# Altium PCB AnalogIO-CAN-HW-Rev1.PcbDoc (part 1 of 2)
Units mil, origin at the board's own origin, x right, y up, seen from the top; angles counter-clockwise.
Board outline 6000 x 4000 mil, 4 copper layers (Top Layer, Power Layer, Ground Layer, Bottom Layer), stack 22.156 mil thick; 185 components, 126 nets, 530 pads, 4 vias.
Unrouted connection lines stored in the file: 357.
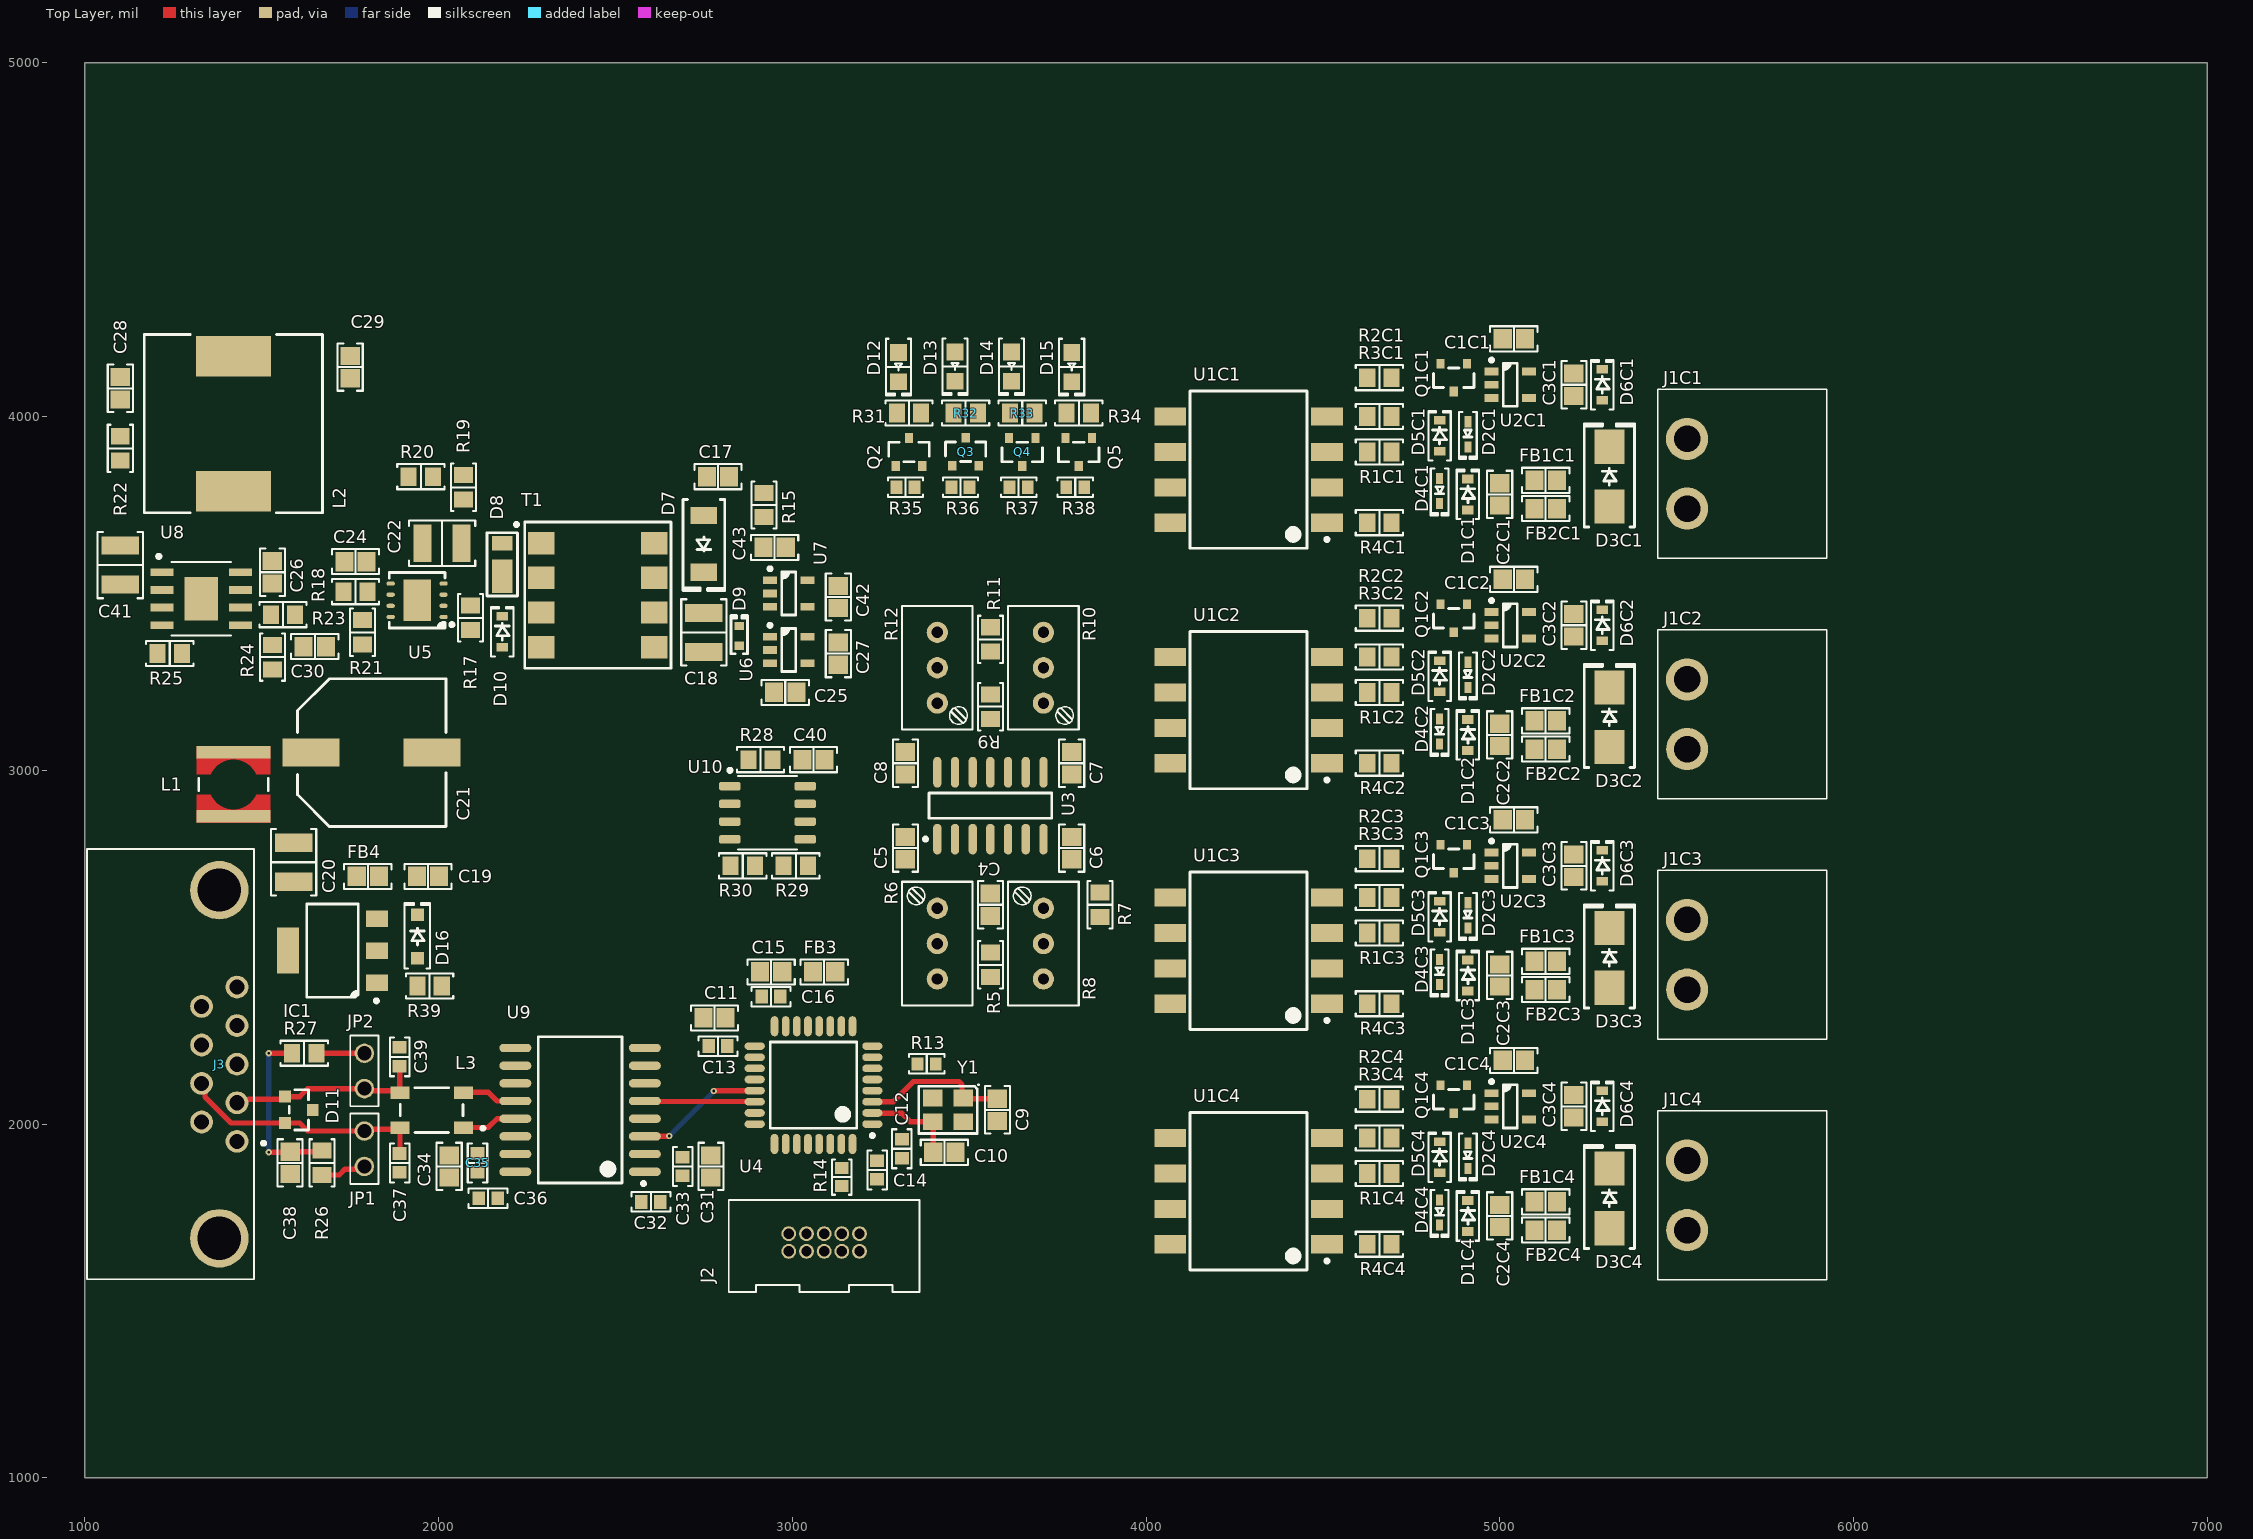
[diagram p0: Top Layer view]
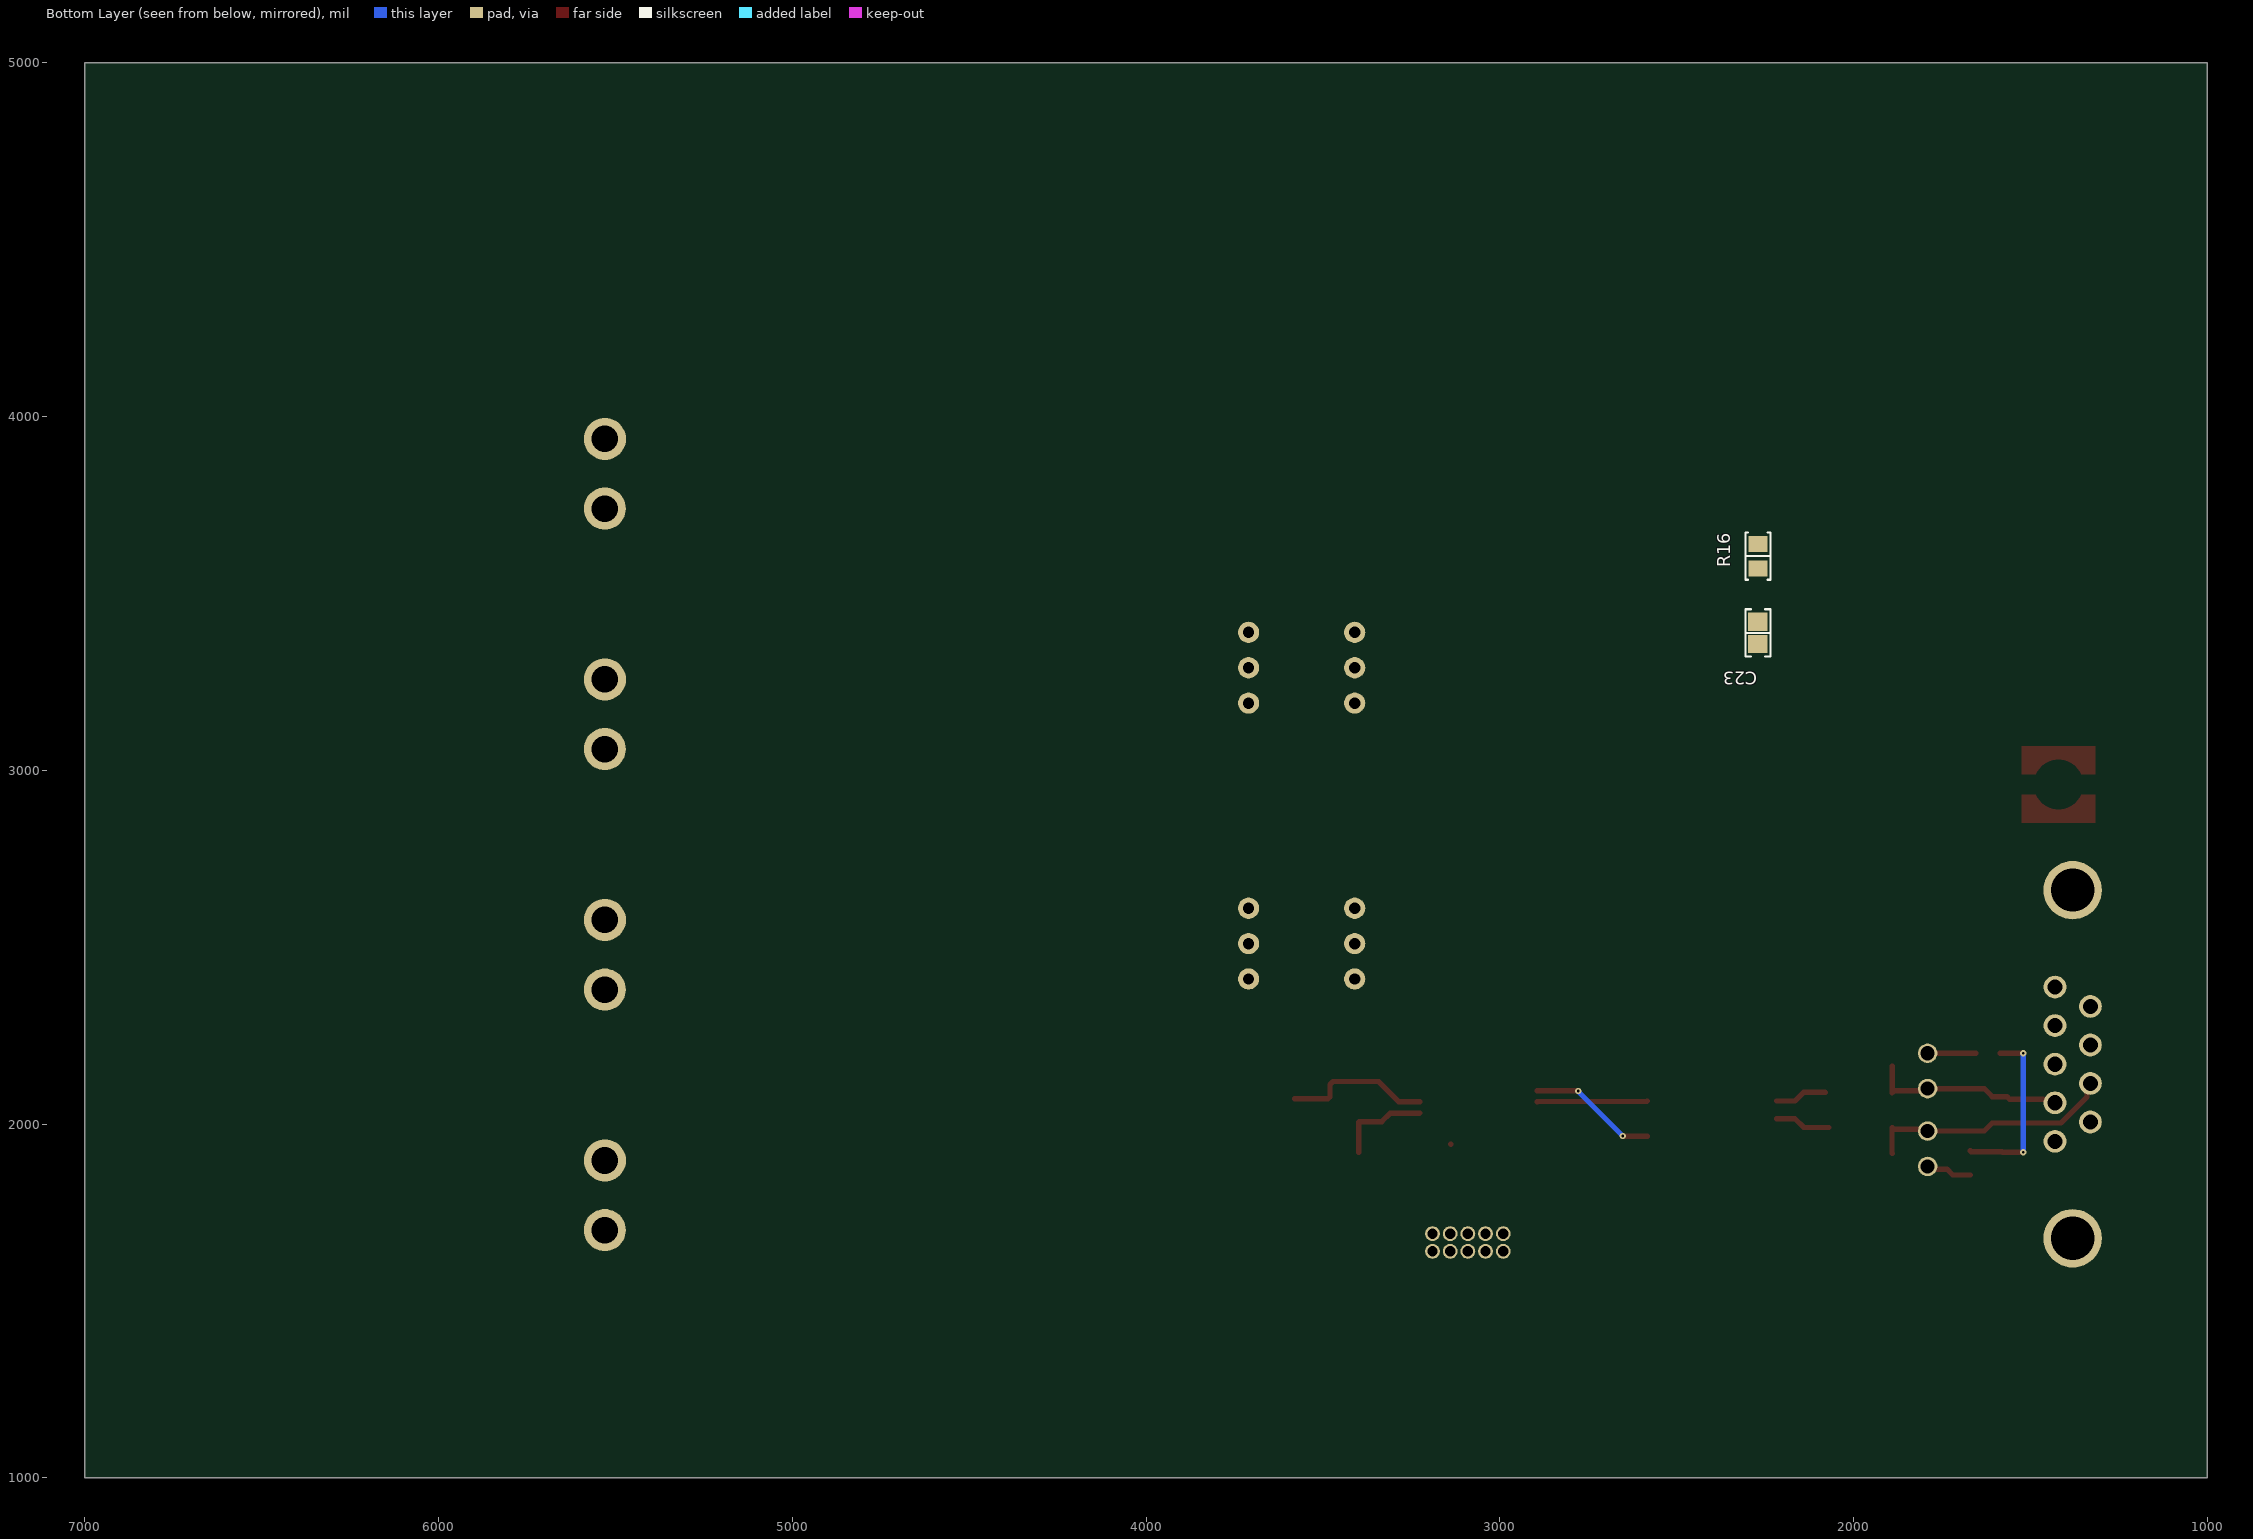
[diagram p1: Bottom Layer view, seen from below]

## Layer stack, top to bottom
Top Solder: solder mask 0.4, Solder Resist, Dk 3.5
Top Layer: signal copper 1.4
Dielectric 2: prepreg 2, PP-001, Dk 3.9
Power Layer: signal copper 1.378
Dielectric 1: dielectric 12.6, FR-4, Dk 4.8
Ground Layer: signal copper 1.378
Dielectric 3: prepreg 2, PP-001, Dk 3.9
Bottom Layer: signal copper 1.4
Bottom Solder: solder mask 0.4, Solder Resist, Dk 3.5

## Board outline
1000,1000 7000,1000 7000,5000 1000,5000

## Design rules (kind name [scope] priority, off if disabled: settings)
BoardOutlineClearance [All] p1: gap=7.87 ignorepadtopadclearanceinfootprint=FALSE
Clearance [All] p1: gap=4 ignorepadtopadclearanceinfootprint=FALSE except(5: Arc-Via Track-Via SMDPad-Via THPad-Via Via-Via Via-Fill Via-Poly Via-Region Via-Text; 9.84: Arc-Hole Track-Hole SMDPad-Hole THPad-Hole Via-Hole Fill-Hole Poly-Hole Region-Hole Text-Hole)
ComponentClearance [All] p1: gap=4 collisioncheckmode=3 verticalgap=4 showdistances=TRUE
DiffPairsRouting [All] p1: maxlimit=4 minlimit=4 mostfreqgap=4 toplayer_minwidth=4 toplayer_maxwidth=71497.94 toplayer_prefwidth=4 midlayer1_minwidth=4 midlayer1_maxwidth=71497.94 midlayer1_prefwidth=4 midlayer2_minwidth=4 midlayer2_maxwidth=71497.94 midlayer2_prefwidth=4 bottomlayer_minwidth=4 bottomlayer_maxwidth=71497.94 bottomlayer_prefwidth=4 maxuncoupledlength=500
Height [All] p1: minheight=0 maxheight=71497.94 prefheight=500
HoleSize [All] p1: absolutevalues=TRUE maxlimit=248.03 minlimit=7.87 maxpercent=80.000 minpercent=20.000
HoleToHoleClearance [All] p1: gap=9.84 allowstackedmicrovias=FALSE
MinimumAnnularRing [All] p1: minimumring=3
MinimumSolderMaskSliver [All] p1: minsoldermaskwidth=0
PlaneClearance [All] p1: clearance=4
PlaneConnect PlaneConnectPowerPads [InPadClass('PowerPads')] p1: planeconnectstyle=Direct reliefexpansion=20 reliefentries=4 reliefconductorwidth=10 reliefairgap=10
PlaneConnect [All] p2: pad.planeconnectstyle=Relief pad.reliefexpansion=11.81 pad.reliefentries=4 pad.reliefconductorwidth=4 pad.reliefairgap=4 via.planeconnectstyle=Direct via.reliefexpansion=11.81 via.reliefentries=4 via.reliefconductorwidth=5 via.reliefairgap=5
PolygonConnect PolygonConnectPowerPads [All vs (InPadClass('PowerPads'))] p1: connectstyle=Direct reliefconductorwidth=10 reliefentries=4 polygonreliefangle="90 Angle" airgapwidth=10
PolygonConnect [All] p2: thpad.connectstyle=Relief thpad.reliefconductorwidth=4 thpad.reliefentries=4 thpad.polygonreliefangle="90 Angle" thpad.airgapwidth=4 smdpad.connectstyle=Relief smdpad.reliefconductorwidth=4 smdpad.reliefentries=4 smdpad.polygonreliefangle="90 Angle" smdpad.airgapwidth=4 via.connectstyle=Direct via.reliefconductorwidth=5 via.reliefentries=4 via.polygonreliefangle="90 Angle" via.airgapwidth=5
RoomDefinition U_PowerModule [InComponentClass('U_PowerModule')] p1: confinementstyle=ConfineIn formatcopy=TRUE lockcomponents=FALSE outline 0,0 2000,0 2000,1000 0,1000
RoomDefinition U_Peripherals [InComponentClass('U_Peripherals')] p2: confinementstyle=ConfineIn formatcopy=TRUE lockcomponents=FALSE outline 0,0 2000,0 2000,1000 0,1000
RoomDefinition U_CPU [InComponentClass('U_CPU')] p3: confinementstyle=ConfineIn formatcopy=TRUE lockcomponents=FALSE outline 0,0 2000,0 2000,1000 0,1000
RoomDefinition U_CanTransceiver [InComponentClass('U_CanTransceiver')] p4: confinementstyle=ConfineIn formatcopy=TRUE lockcomponents=FALSE outline 0,0 2000,0 2000,1000 0,1000
RoomDefinition U_AnalogueIsolatedReceiver [InComponentClass('U_AnalogueIsolatedReceiver')] p5: confinementstyle=ConfineIn formatcopy=TRUE lockcomponents=FALSE outline 3840,0 5840,0 5840,1000 3840,1000
RoomDefinition ARM4 [InComponentClass('ARM4')] p6: confinementstyle=ConfineIn formatcopy=TRUE lockcomponents=FALSE outline 4010,1550 5940,1550 5940,2230 4010,2230
RoomDefinition ARM3 [InComponentClass('ARM3')] p7: confinementstyle=ConfineIn formatcopy=TRUE lockcomponents=FALSE outline 4010,2230 5940,2230 5940,2910 4010,2910
RoomDefinition ARM2 [InComponentClass('ARM2')] p8: confinementstyle=ConfineIn formatcopy=TRUE lockcomponents=FALSE outline 4010,2910 5940,2910 5940,3590 4010,3590
RoomDefinition ARM1 [InComponentClass('ARM1')] p9: confinementstyle=ConfineIn formatcopy=TRUE lockcomponents=FALSE outline 4010,3590 5940,3590 5940,4270 4010,4270
RoutingVias [All] p1: holewidth=7.87 width=17.72 viastyle="Through Hole" minholewidth=7.87 minwidth=17.72 maxholewidth=248.03 maxwidth=257.87
SilkToSilkClearance [All] p1: silktosilkclearance=0
SilkToSolderMaskClearance [IsPad] p1: minsilkscreentomaskgap=4 clearancetoexposedcopper=TRUE
SolderMaskExpansion [All] p1: expansion=2.95 istentingtop=FALSE
Width [All] p1: maxlimit=71497.94 minlimit=4 preferedwidth=4
20 further rules are at their usual default settings.

## Classes and differential pairs
channel class AnalogReceiverModule: ARM1 ARM2 ARM3 ARM4
net class LEDIND[1..4]: LEDIND1 LEDIND2 LEDIND3 LEDIND4
net class ISOIN[1..4]: ISOIN1 ISOIN2 ISOIN3 ISOIN4
net class AICHN[1..4]: AICHN1 AICHN2 AICHN3 AICHN4
component class U_PowerModule: C17 C18 C19 C20 C21 C22 C23 C24 C25 C26 C27 C28 C29 C30 C41 C42 C43 D7 D8 D9 D10 D16 FB4 IC1 L1 L2 R15 R16 R17 R18 R19 R20 R21 R22 R23 R24 R25 R39 T1 U5 U6 U7 U8
component class U_Peripherals: " " "    " C40 D12 D13 D14 D15 Q2 Q3 Q4 Q5 R28 R29 R30 R31 R32 R33 R34 R35 R36 R37 R38 U10
component class U_CPU: C9 C10 C11 C12 C13 C14 C15 C16 FB3 J2 R13 R14 U4 Y1
component class U_CanTransceiver: C31 C32 C33 C34 C35 C36 C37 C38 C39 D11 J3 JP1 JP2 L3 R26 R27 U9
component class U_AnalogueIsolatedReceiver: C4 C5 C6 C7 C8 R5 R6 R7 R8 R9 R10 R11 R12 U3
component class ARM4: C1C4 C2C4 C3C4 D1C4 D2C4 D3C4 D4C4 D5C4 D6C4 FB1C4 FB2C4 J1C4 Q1C4 R1C4 R2C4 R3C4 R4C4 U1C4 U2C4
component class ARM3: C1C3 C2C3 C3C3 D1C3 D2C3 D3C3 D4C3 D5C3 D6C3 FB1C3 FB2C3 J1C3 Q1C3 R1C3 R2C3 R3C3 R4C3 U1C3 U2C3
component class ARM2: C1C2 C2C2 C3C2 D1C2 D2C2 D3C2 D4C2 D5C2 D6C2 FB1C2 FB2C2 J1C2 Q1C2 R1C2 R2C2 R3C2 R4C2 U1C2 U2C2
component class ARM1: C1C1 C2C1 C3C1 D1C1 D2C1 D3C1 D4C1 D5C1 D6C1 FB1C1 FB2C1 J1C1 Q1C1 R1C1 R2C1 R3C1 R4C1 U1C1 U2C1

## Components (designator, comment, footprint, x,y, rotation, side; value= is the part's Value field where it differs from the comment)
C1C1 "1 nF" "CAP 0805_2012" 5040,4220 r0 top (schematic designator C1)
C1C2 "1 nF" "CAP 0805_2012" 5040,3540 r0 top (schematic designator C1)
C1C3 "1 nF" "CAP 0805_2012" 5040,2860 r0 top (schematic designator C1)
C1C4 "1 nF" "CAP 0805_2012" 5040,2180 r0 top (schematic designator C1)
C2C1 "10 nF" "CAP 0805_2012" 5000,3780 r270 top (schematic designator C2)
C2C2 "10 nF" "CAP 0805_2012" 5000,3100 r270 top (schematic designator C2)
C2C3 "10 nF" "CAP 0805_2012" 5000,2420 r270 top (schematic designator C2)
C2C4 "10 nF" "CAP 0805_2012" 5000,1740 r270 top (schematic designator C2)
C3C1 "100 nF" "CAP 0805_2012" 5210,4090 r90 top (schematic designator C3)
C3C2 "100 nF" "CAP 0805_2012" 5210,3410 r90 top (schematic designator C3)
C3C3 "100 nF" "CAP 0805_2012" 5210,2730 r90 top (schematic designator C3)
C3C4 "100 nF" "CAP 0805_2012" 5210,2050 r90 top (schematic designator C3)
C4 "100 nF" "CAP 0805_2012" 3560,2620 r90 top
C5 "1 nF" "CAP 0805_2012" 3320,2780 r270 top
C6 "1 nF" "CAP 0805_2012" 3790,2780 r270 top
C7 "1 nF" "CAP 0805_2012" 3790,3020 r90 top
C8 "1 nF" "CAP 0805_2012" 3320,3020 r90 top
C9 "5.1 pF" "CAP 0805_2012" 3580,2040 r270 top
C10 "5.1 pF" "CAP 0805_2012" 3430,1920 r180 top
C11 "4.7 uF" "CAP 0805_2012" 2780,2300 r0 top
C12 "100 nF" "CAP 0603_1608" 3310,1930 r270 top
C13 "100 nF" "CAP 0603_1608" 2790,2220 r180 top
C14 "100 nF" "CAP 0603_1608" 3240,1870 r270 top
C15 "1 uF" "CAP 0805_2012" 2940,2430 r0 top
C16 "100 nF" "CAP 0603_1608" 2940,2360 r180 top
C17 "22 pF" "CAP 0805_2012" 2790,3830 r0 top
C18 "100 uF" "CAP 1210_3225 - 2.5MM" 2750,3390 r270 top
C19 "0.1 uF" "CAP 0805_2012" 1970,2700 r0 top
C20 "4.7 uF" "CAP 1210_3225 - 2.0MM" 1590,2740 r270 top
C21 "33 uF" "CAP ALSMD POLY 10.3MM H10.2MM" 1810,3050 r0 top
C22 "4.7 uF" "CAP 1210_3225 - 2.0MM" 2010,3642 r0 top
C23 "22 pF" "CAP 0805_2012" 2270,3388.5 r270 bottom
C24 "47 nF" "CAP 0805_2012" 1765,3590 r0 top
C25 "1 uF" "CAP 0805_2012" 2980,3220 r0 top
C26 "2.2 nF" "CAP 0805_2012" 1530,3560 r270 top
C27 "1 uF" "CAP 0805_2012" 3130,3330 r270 top
C28 "1.2 nF" "CAP 0805_2012" 1100,4080 r270 top
C29 "2.2 uF" "CAP 0805_2012" 1750,4140 r90 top
C30 "56 pF" "CAP 0805_2012" 1650,3350 r0 top
C31 "10 uF" "CAP 0805_2012" 2770,1880 r90 top
C32 "1 uF" "CAP 0603_1608" 2600,1780 r0 top
C33 "100 nF" "CAP 0603_1608" 2690,1880 r90 top
C34 "10 uF" "CAP 0805_2012" 2030,1880 r90 top
C35 "1 uF" "CAP 0603_1608" 2110,1890 r270 top
C36 "100 nF" "CAP 0603_1608" 2140,1790 r180 top
C37 "68 pF" "CAP 0603_1608" 1890,1890 r270 top
C38 "47 nF" "CAP 0805_2012" 1580,1890 r90 top
C39 "68 pF" "CAP 0603_1608" 1890,2190 r270 top
C40 "10 nF" "CAP 0805_2012" 3060,3030 r180 top
C41 "2.2 uF" "CAP 1210_3225 - 2.5MM" 1100,3580 r270 top
C42 "1 uF" "CAP 0805_2012" 3130,3490 r270 top
C43 "1 uF" "CAP 0805_2012" 2950,3630 r0 top
D1C1 "BAT46JFILM" SOD323 4910,3780 r90 top (schematic designator D1)
D1C2 "BAT46JFILM" SOD323 4910,3100 r90 top (schematic designator D1)
D1C3 "BAT46JFILM" SOD323 4910,2420 r90 top (schematic designator D1)
D1C4 "BAT46JFILM" SOD323 4910,1740 r90 top (schematic designator D1)
D2C1 "CDSU101A-HF" SOD523F 4910,3950 r270 top (schematic designator D2)
D2C2 "CDSU101A-HF" SOD523F 4910,3270 r270 top (schematic designator D2)
D2C3 "CDSU101A-HF" SOD523F 4910,2590 r270 top (schematic designator D2)
D2C4 "CDSU101A-HF" SOD523F 4910,1910 r270 top (schematic designator D2)
D3C1 "SM6T39CAY" "DO214AA SMB" 5310,3830 r90 top (schematic designator D3)
D3C2 "SM6T39CAY" "DO214AA SMB" 5310,3150 r90 top (schematic designator D3)
D3C3 "SM6T39CAY" "DO214AA SMB" 5310,2470 r90 top (schematic designator D3)
D3C4 "SM6T39CAY" "DO214AA SMB" 5310,1790 r90 top (schematic designator D3)
D4C1 "CDSU101A-HF" SOD523F 4830,3790 r270 top (schematic designator D4)
D4C2 "CDSU101A-HF" SOD523F 4830,3110 r270 top (schematic designator D4)
D4C3 "CDSU101A-HF" SOD523F 4830,2430 r270 top (schematic designator D4)
D4C4 "CDSU101A-HF" SOD523F 4830,1750 r270 top (schematic designator D4)
D5C1 "BAT46JFILM" SOD323 4830,3946.2 r90 top (schematic designator D5)
D5C2 "BAT46JFILM" SOD323 4830,3266.2 r90 top (schematic designator D5)
D5C3 "BAT46JFILM" SOD323 4830,2586.2 r90 top (schematic designator D5)
D5C4 "BAT46JFILM" SOD323 4830,1906.2 r90 top (schematic designator D5)
D6C1 "BZX384C3V3-E3-08" SOD323 5290,4090 r90 top (schematic designator D6)
D6C2 "BZX384C3V3-E3-08" SOD323 5290,3410 r90 top (schematic designator D6)
D6C3 "BZX384C3V3-E3-08" SOD323 5290,2730 r90 top (schematic designator D6)
D6C4 "BZX384C3V3-E3-08" SOD323 5290,2050 r90 top (schematic designator D6)
D7 "FSV340AF" "ON DO214AD SMAF" 2750,3640 r270 top
D8 "DFLZ24-7" POWERDI123 2180,3589 r90 top
D9 "BZT52C4V7T" SOD-523 2850,3380 r90 top
D10 "CMDD4448" SOD323 2180,3392 r90 top
D11 "CDSOT23-SM712" "BOURNS SOT-23-3" 1605,2040 r0 top
D12 "VFHD1112H-3B72B-TR" "LED 0805_2012 GREEN" 3300,4140 r270 top
D13 "VFHD1112H-3B72B-TR" "LED 0805_2012 GREEN" 3460,4141.34 r270 top
D14 "VFHD1112H-3B72B-TR" "LED 0805_2012 GREEN" 3620,4141.34 r270 top
D15 "VFHD1112H-3B72B-TR" "LED 0805_2012 GREEN" 3790,4140 r270 top
D16 "MMSZ5240BS-7-F" SOD-123 1940,2530 r90 top
FB1C1 "600 Ohms @ 100 MHz" "FER 0805_2012" 5130,3740 r180 top (schematic designator FB1)
FB1C2 "600 Ohms @ 100 MHz" "FER 0805_2012" 5130,3060 r180 top (schematic designator FB1)
FB1C3 "600 Ohms @ 100 MHz" "FER 0805_2012" 5130,2380 r180 top (schematic designator FB1)
FB1C4 "600 Ohms @ 100 MHz" "FER 0805_2012" 5130,1700 r180 top (schematic designator FB1)
FB2C1 "600 Ohms @ 100 MHz" "FER 0805_2012" 5130,3820 r0 top (schematic designator FB2)
FB2C2 "600 Ohms @ 100 MHz" "FER 0805_2012" 5130,3140 r0 top (schematic designator FB2)
FB2C3 "600 Ohms @ 100 MHz" "FER 0805_2012" 5130,2460 r0 top (schematic designator FB2)
FB2C4 "600 Ohms @ 100 MHz" "FER 0805_2012" 5130,1780 r0 top (schematic designator FB2)
FB3 "600 Ohms" "FER 0805_2012" 3090,2430 r0 top
FB4 "22 Ohms @ 100 MHz" "FER 0805_2012" 1800,2700 r0 top
IC1 "ZXMP10A18GTA" "DIODES SOT-223" 1700,2490 r180 top
J1C1 "1757475" MSTBA2 5529.76,3936.82 r180 top (schematic designator J1)
J1C2 "1757475" MSTBA2 5529.76,3256.82 r180 top (schematic designator J1)
J1C3 "1757475" MSTBA2 5529.76,2576.82 r180 top (schematic designator J1)
J1C4 "1757475" MSTBA2 5529.76,1896.82 r180 top (schematic designator J1)
J2 "SHF-105-01-L-D-TH" SHF-105-01-X-D-TH 3090,1665 r180 top
J3 "09681537613" DSUB9 1380,2169.06 r270 top
JP1 "61300211121" JUMPER-100 1790,1930 r270 top
JP2 "61300211121" JUMPER-100 1790,2150 r90 top
L1 "10 uH" WE-TPC_4818 1420,2960 r0 top
L2 "330 uH" "BOURNS SRR1280" 1420,3980 r90 top
L3 "51 uH" TDK_ACT45B 1980.43,2039.21 r180 top
Q1C1 "MMBT3906,215" "NEXPERIA SOT-23-3" 4870,4110 r270 top (schematic designator Q1)
Q1C2 "MMBT3906,215" "NEXPERIA SOT-23-3" 4870,3430 r270 top (schematic designator Q1)
Q1C3 "MMBT3906,215" "NEXPERIA SOT-23-3" 4870,2750 r270 top (schematic designator Q1)
Q1C4 "MMBT3906,215" "NEXPERIA SOT-23-3" 4870,2070 r270 top (schematic designator Q1)
Q2 "MMBT3904,215" "NEXPERIA SOT-23-3" 3330,3900 r90 top
Q3 "MMBT3904,215" "NEXPERIA SOT-23-3" 3490,3900.63 r90 top
Q4 "MMBT3904,215" "NEXPERIA SOT-23-3" 3650,3900 r270 top
Q5 "MMBT3904,215" "NEXPERIA SOT-23-3" 3810,3900 r270 top
R1C1 "25 Ohms" "RES 0805_2012" 4660,3900 r180 top (schematic designator R1)
R1C2 "25 Ohms" "RES 0805_2012" 4660,3220 r180 top (schematic designator R1)
R1C3 "25 Ohms" "RES 0805_2012" 4660,2540 r180 top (schematic designator R1)
R1C4 "25 Ohms" "RES 0805_2012" 4660,1860 r180 top (schematic designator R1)
R2C1 "10 kOhms" "RES 0805_2012" 4660,4110 r180 top (schematic designator R2)
R2C2 "10 kOhms" "RES 0805_2012" 4660,3430 r180 top (schematic designator R2)
R2C3 "10 kOhms" "RES 0805_2012" 4660,2750 r180 top (schematic designator R2)
R2C4 "10 kOhms" "RES 0805_2012" 4660,2070 r180 top (schematic designator R2)
R3C1 "10 kOhms" "RES 0805_2012" 4660,4000 r180 top (schematic designator R3)
R3C2 "10 kOhms" "RES 0805_2012" 4660,3320 r180 top (schematic designator R3)
R3C3 "10 kOhms" "RES 0805_2012" 4660,2640 r180 top (schematic designator R3)
R3C4 "10 kOhms" "RES 0805_2012" 4660,1960 r180 top (schematic designator R3)
R4C1 "100 Ohms" "RES 0805_2012" 4660,3700 r0 top (schematic designator R4)
R4C2 "100 Ohms" "RES 0805_2012" 4660,3020 r0 top (schematic designator R4)
R4C3 "100 Ohms" "RES 0805_2012" 4660,2340 r0 top (schematic designator R4)
R4C4 "100 Ohms" "RES 0805_2012" 4660,1660 r0 top (schematic designator R4)
R5 "47.5 kOhms" "RES 0805_2012" 3560,2450 r90 top
R6 "Value" TRIMMER 3410,2410 r90 top
R7 "47.5 kOhms" "RES 0805_2012" 3870,2620 r90 top
R8 "Value" TRIMMER 3710,2410 r90 top
R9 "47.5 kOhms" "RES 0805_2012" 3560,3180 r270 top
R10 "Value" TRIMMER 3710,3390 r270 top
R11 "47.5 kOhms" "RES 0805_2012" 3560,3370 r270 top
R12 "Value" TRIMMER 3410,3390 r270 top
R13 "10 kOhms" "RES 0603_1608" 3380,2170 r180 top
R14 "10 kOhms" "RES 0603_1608" 3140,1850 r270 top
R15 "100 Ohms" "RES 0805_2012" 2920,3750 r90 top
R16 "100 Ohms" "RES 0805_2012" 2270,3605.55 r90 bottom
R17 "130 kOhms" "RES 0805_2012" 2090,3431 r90 top
R18 "130 kOhms" "RES 0805_2012" 1765,3505 r180 top
R19 "536 kOhms" "RES 0805_2012" 2070,3800 r90 top
R20 "100 kOhms" "RES 0805_2012" 1950,3830 r0 top
R21 "12.1 kOhms" "RES 0805_2012" 1785,3390 r270 top
R22 "340 kOhms" "RES 0805_2012" 1100,3910 r270 top
R23 "316 kOhms" "RES 0805_2012" 1560,3440 r180 top
R24 "100 kOhms" "RES 0805_2012" 1530,3320 r270 top
R25 "41.2 kOhms" "RES 0805_2012" 1240,3330 r0 top
R26 "60.4 Ohms" "RES 0805_2012" 1670,1890 r270 top
R27 "60.4 Ohms" "RES 0805_2012" 1620,2200 r0 top
R28 "5 kOhms" "RES 0805_2012" 2910,3030 r0 top
R29 "5 kOhms" "RES 0805_2012" 3010,2730 r0 top
R30 "5 kOhms" "RES 0805_2012" 2860,2730 r0 top
R31 "240 Ohms" "RES 0805_2012" 3330,4010 r0 top
R32 "240 Ohms" "RES 0805_2012" 3490,4010 r0 top
R33 "240 Ohms" "RES 0805_2012" 3650,4010 r0 top
R34 "240 Ohms" "RES 0805_2012" 3810,4010 r0 top
R35 "10 kOhms" "RES 0603_1608" 3320,3800 r180 top
R36 "10 kOhms" "RES 0603_1608" 3475.59,3800 r180 top
R37 "10 kOhms" "RES 0603_1608" 3640,3800 r0 top
R38 "10 kOhms" "RES 0603_1608" 3800,3800 r0 top
R39 "28 kOhms" "RES 0805_2012" 1974.45,2390 r180 top
T1 "YA8779-BLD" YA8779 2450,3495 r0 top
U1C1 "HCNR200-550E" HCNR200 4290,3850 r180 top (schematic designator U1)
U1C2 "HCNR200-550E" HCNR200 4290,3170 r180 top (schematic designator U1)
U1C3 "HCNR200-550E" HCNR200 4290,2490 r180 top (schematic designator U1)
U1C4 "HCNR200-550E" HCNR200 4290,1810 r180 top (schematic designator U1)
U2C1 "TLV2371IDBV" "TI SOT-23-5 DBV" 5030,4090 r0 top (schematic designator U2)
U2C2 "TLV2371IDBV" "TI SOT-23-5 DBV" 5030,3410 r0 top (schematic designator U2)
U2C3 "TLV2371IDBV" "TI SOT-23-5 DBV" 5030,2730 r0 top (schematic designator U2)
U2C4 "TLV2371IDBV" "TI SOT-23-5 DBV" 5030,2050 r0 top (schematic designator U2)
U3 "TLV2374ID" TI-D14_N 3560,2900 r90 top
U4 "STM32G431KBT6" LQFP32ST 3060,2110 r180 top
U5 "LM5180QNGURQ1" "TI WSON-8 NGU" 1939.2,3480.76 r180 top
U6 "TLV70233DBVR" "TI SOT-23-5 DBV" 2990,3340 r0 top
U7 "TLV70233DBVR" "TI SOT-23-5 DBV" 2990,3500 r0 top
U8 "LM5163DDAR" SOIC_DDAR_TEX#1 1328.75,3485 r0 top
U9 "ISO1042DWR" TI-DW16_N 2400,2040 r180 top
U10 "TMP1075DR" SOIC_DDAR_TEX#2 2930,2880 r0 top
Y1 "24 MHz" ABM8G 3440,2040 r180 top

## Footprints (in the part's own frame and the unit in brackets; to place one, negate y for a bottom-side part, rotate by r counter-clockwise, add the part's x,y. Pads: shape width x height; smd on the part's side, far side on the other; paste and mask are expansions set on the pad)
ABM8G [mm] "Crystal, 4-Leads, Body 2.50x3.20mm, Pitch 2.20mm, IPC Medium Density"
  rect 1.4x1.2 smd: 1(-1.1,-0.85) 2(1.1,-0.85) 3(1.1,0.85) 4(-1.1,0.85)
  silkscreen extent -2.25,-1.85 2.1,1.7, body extent -1.61,-1.26 1.61,1.26, height 0.6
"BOURNS SOT-23-3" [mm] "SOT23, 3-Leads, Body 2.90x2.40mm, Pitch 0.95mm, IPC Medium Density"
  rect 0.85x0.85 smd: 1(-1,0.95) 2(-1,-0.95) 3(1,0)
  silkscreen extent -0.7,-1.45 0.7,1.45, body extent -1.16,-1.45 1.16,1.45, height 1.5
"BOURNS SRR1280" [mm] "Precision Wire Wound Inductor, 2-Leads, Body 12.50x12.50mm, IPC Medium Density"
  rect 2.9x5.4 smd: 1(-4.85,0) 2(4.85,0)
  silkscreen extent -6.4,-6.4 6.4,6.4, body extent -6.25,-6.25 6.25,6.25, height 7.9
"CAP 0603_1608" [mm] "Chip Capacitor, 2-Leads, Body 1.60x0.80mm, IPC Medium Density"
  rect 0.9x1 smd: 1(-0.675,0) 2(0.675,0)
  silkscreen extent -1.4,-0.7 1.4,0.7, body extent -0.8,-0.41 0.8,0.41, height 0.82
"CAP 0805_2012" [mm] "Chip Capacitor, 2-Leads, Body 2.00x1.20mm, IPC Medium Density"
  rect 1.3x1.4 smd: 1(-0.8,0) 2(0.8,0)
  silkscreen extent -1.7,-0.9 1.7,0.9, body extent -1,-0.64 1,0.64, height 1.26
"CAP 1210_3225 - 2.0MM" [mm] "Chip Capacitor, 2-Leads, Body 3.20x2.50mm, IPC Medium Density"
  rect 1.3x2.7 smd: 1(-1.4,0) 2(1.4,0)
  silkscreen extent -2.37,-1.63 2.37,1.63, body extent -1.6,-1.25 1.6,1.25, height 2
"CAP 1210_3225 - 2.5MM" [mm] "Chip Capacitor, 2-Leads, Body 3.20x2.50mm, IPC Medium Density"
  rect 1.3x2.7 smd: 1(-1.4,0) 2(1.4,0)
  silkscreen extent -2.37,-1.63 2.37,1.63, body extent -1.6,-1.25 1.6,1.25, height 2.5
"CAP ALSMD POLY 10.3MM H10.2MM" [mm] "Aluminum Electrolytic Capacitor, Body 10.3x10.3x10mm"
  rect 4.1x2 smd: 1(-4.35,0) 2(4.35,0)
  silkscreen extent -5.3,-5.3 5.35,5.3, body extent -5.85,-5.15 5.85,5.15, height 10.2
"DIODES SOT-223" [mm] "SOT223, 4-Leads, Body 6.50x7.00mm (avg), Pitch 2.30mm, IPC Medium Density"
  rect 1.6x1.2 smd: 1(-3.2,2.3) 2(-3.2,0) 3(-3.2,-2.3)
  rect 1.6x3.3 smd: 4(3.2,0)
  silkscreen extent -3.27,-3.35 1.85,3.72, body extent -3.52,-3.25 3.5,3.25, height 1.8
"DO214AA SMB" [mm] "Molded Diode, 2-Leads, Body 4.31x3.62mm, IPC Medium Density"
  rect 2.45x2.15 smd: 1(-2.15,0) 2(2.15,0)
  silkscreen extent -3.6,-1.8 3.8,1.8, body extent -2.6,-1.8 2.6,1.8, height 2.4
DSUB9 [mm] "Harting DSUB9 Right Angle"
  round 1.635 hole 1.09: 1(5.54,1.27) 2(2.77,1.27) 3(0,1.27) 4(-2.77,1.27) 5(-5.54,1.27) 6(4.15,-1.27) 7(1.38,-1.27) 8(-1.38,-1.27) 9(-4.15,-1.27)
  round 4.2 hole 3.1: S1(-12.5,0) S2(12.5,0)
  silkscreen extent -15.45,-9.5 15.45,3.27, body extent -15.45,-15.7 15.45,2.5, height 12.6
"FER 0805_2012" [mm] "Chip Ferrite, 2-Leads, Body 2.00x1.20mm, IPC Medium Density"
  rect 1.3x1.4 smd: 1(-0.8,0) 2(0.8,0)
  silkscreen extent -1.7,-0.9 1.7,0.9, body extent -1,-0.64 1,0.64, height 1.26
HCNR200 [mm] "SOP, 8-Leads, Body 11,15x8,95mm, Pitch 2,54mm, IPC Medium Density"
  rect 2.29x1.3 smd: 1(-5.625,3.81) 2(-5.625,1.27) 3(-5.625,-1.27) 4(-5.625,-3.81) 5(5.625,-3.81) 6(5.625,-1.27) 7(5.625,1.27) 8(5.625,3.81)
  silkscreen extent -5.75,-5.65 4.2,5.65, body extent -6.15,-5.65 6.15,5.65, height 4
JUMPER-100 [mil] "Jumper Header 100 mil"
  round 55 hole 40: 1(-50,0) 2(50,0)
  silkscreen extent -100,-40 100,40, body extent -100,-50 100,50, height 344
"LED 0805_2012 GREEN" [mm] "Chip Diode, 2-Leads, Body 2.00x1.25mm, IPC Medium Density"
  rect 1.2x1.2 smd: 1(-1.05,0) 2(1.05,0)
  silkscreen extent -2.03,-0.9 2.03,0.9, body extent -1,-0.62 1,0.63, height 0.9
LQFP32ST [mm] "TQFP, 32-Leads, Body 7,00x7,00mm, Pitch 0,80mm, IPC Medium Density"
  oval 1.45x0.55 smd: 1(-4.225,2.8) 2(-4.225,2) 3(-4.225,1.2) 4(-4.225,0.4) 5(-4.225,-0.4) 6(-4.225,-1.2) 7(-4.225,-2) 8(-4.225,-2.8) 17(4.225,-2.8) 18(4.225,-2) 19(4.225,-1.2) 20(4.225,-0.4) 21(4.225,0.4) 22(4.225,1.2) 23(4.225,2) 24(4.225,2.8)
  oval 0.55x1.45 smd: 9(-2.8,-4.225) 10(-2,-4.225) 11(-1.2,-4.225) 12(-0.4,-4.225) 13(0.4,-4.225) 14(1.2,-4.225) 15(2,-4.225) 16(2.8,-4.225) 25(2.8,4.225) 26(2,4.225) 27(1.2,4.225) 28(0.4,4.225) 29(-0.4,4.225) 30(-1.2,4.225) 31(-2,4.225) 32(-2.8,4.225)
  silkscreen extent -4.35,-3.1 3.1,3.75, body extent -3.5,-3.5 3.5,3.5, height 1.6
MSTBA2 [mil] "Phoenix Contact MSTBA Base strip 2 Contacts"
  round 119 hole 75: 1(0,0) 2(-0.24,196.82)
  silkscreen extent -395,-140 83,338, body extent -392,-137 80,335, height 340
"NEXPERIA SOT-23-3" [mm] "SOT23, 3-Leads, Body 2.90x2.40mm, Pitch 0.95mm, IPC Medium Density"
  rect 0.7x0.6 smd: 1(-1,0.95) 2(-1,-0.95) 3(1,0)
  silkscreen extent -0.7,-1.45 0.7,1.45, body extent -1.16,-1.45 1.16,1.45, height 1.5
"ON DO214AD SMAF" [mm] "Molded Diode, 2-Leads, Body 4.30x2.60mm, IPC Medium Density"
  rect 1.24x1.89 smd: 1(-2.04,0) 2(2.04,0)
  silkscreen extent -3.18,-1.5 3.35,1.5, body extent -2.6,-1.37 2.6,1.37, height 2.4
POWERDI123 [mm]
  rect 1.05x1.5 smd: 1(1.35,0)
  rect 2.4x1.5 smd: 2(-1.025,0)
  silkscreen extent -2.45,-1.1 2.1,1.1, body extent -2.1,-0.96 1.8,0.97, height 1
"RES 0603_1608" [mm] "Chip Resistor, 2-Leads, Body 1.60x0.80mm, IPC Medium Density"
  rect 0.85x0.95 smd: 1(-0.65,0) 2(0.65,0)
  silkscreen extent -1.27,-0.7 1.27,0.7, body extent -0.8,-0.4 0.8,0.4, height 0.45
"RES 0805_2012" [mm] "Chip Resistor, 2-Leads, Body 2.00x1.25mm, IPC Medium Density"
  rect 1.15x1.35 smd: 1(-0.875,0) 2(0.875,0)
  silkscreen extent -1.7,-0.9 1.7,0.9, body extent -0.95,-0.62 1.05,0.63, height 0.6
SHF-105-01-X-D-TH [mil]
  round 42 hole 29: 1(-100,-25) 2(-100,25) 3(-50,-25) 4(-50,25) 5(0,-25) 6(0,25) 7(50,-25) 8(50,25) 9(100,-25) 10(100,25)
  silkscreen extent -270,-120 270,140, body extent -249,-99 251,121, height 210
SOD323 [mm] "SOD, 2-Leads, Body 1.25x2.50mm, IPC Medium Density"
  rect 0.625x0.83 smd: 1(-1.112,0) 2(1.112,0)
  silkscreen extent -1.78,-0.8 1.78,0.8, body extent -1.36,-0.62 1.36,0.62, height 1.05
SOD523F [mm] "SODFL, 2-Leads, Body 0.80x1.60mm, IPC Medium Density"
  rect 0.8x0.5 smd: 1(-0.9,0) 2(0.9,0)
  silkscreen extent -1.6,-0.64 1.8,0.64, body extent -0.8,-0.4 0.8,0.4, height 0.65
SOD-123 [mm] "SOD, 2-Leads, Body 1.55x3.70mm, IPC Medium Density"
  rect 0.9x0.95 smd: 1(-1.575,0) 2(1.575,0)
  silkscreen extent -2.3,-0.92 2.41,0.92, body extent -1.86,-0.78 1.86,0.77, height 1.35
SOD-523 [mm] "Molded Diode, 2-Leads, Body 1.60x0.80mm, IPC Medium Density"
  rect 0.6x0.7 smd: 1(-0.71,0) 2(0.71,0)
  silkscreen extent -1.27,-0.6 1.47,0.6, body extent -0.8,-0.4 0.8,0.4, height 0.82
SOIC_DDAR_TEX#1 [mil] "Texas Instruments POWERPAD-8"
  rect 65.5x22 smd paste+0 mask+0: 1(-111.25,75) 2(-111.25,25) 3(-111.25,-25) 4(-111.25,-75) 5(111.25,-75) 6(111.25,-25) 7(111.25,25) 8(111.25,75)
  rect 94.5x122 smd paste+0 mask+0: 9(0,0)
  silkscreen extent -125,-104 84,125, body extent -118,-96 118,96, height 67
SOIC_DDAR_TEX#2 [mil] "Texas Instruments POWERPAD-8"
  rrect50% 61x24 smd paste+0 mask+0: 1(-106.5,75) 2(-106.5,25) 3(-106.5,-25) 4(-106.5,-75) 5(106.5,-75) 6(106.5,-25) 7(106.5,25) 8(106.5,75)
  silkscreen extent -111,-104 84,125, body extent -118,-96 118,96, height 67
TDK_ACT45B [mm]
  rect 1.35x0.9 smd paste+0 mask+0: 1(-2.275,1.25) 2(-2.275,-1.25) 3(2.275,-1.25) 4(2.275,1.25)
  silkscreen extent -3.8,-1.6 2.25,1.6, body extent -3.05,-1.8 3.05,1.8, height 0.25
"TI SOT-23-5 DBV" [mm] "SOT23, 5-Leads, Body 2.90x2.80mm, Pitch 0.95mm, IPC Medium Density"
  rect 1x0.55 smd: 1(-1.35,0.95) 2(-1.35,0) 3(-1.35,-0.95) 4(1.35,-0.95) 5(1.35,0.95)
  silkscreen extent -1.47,-1.55 0.5,1.9, body extent -1.44,-1.43 1.39,1.48, height 1.5
"TI WSON-8 NGU" [mm] "DFN, 8-Leads, Body 4.00x4.00mm, Pitch 0.80mm, Thermal Pad 3.00X2.6mm, IPC Medium Density"
  oval 0.6x0.3 smd: 1(-1.9,1.2) 2(-1.9,0.4) 3(-1.9,-0.4) 4(-1.9,-1.2) 5(1.9,-1.2) 6(1.9,-0.4) 7(1.9,0.4) 8(1.9,1.2)
  rect 1.98x3 smd: 9(0,0)
  silkscreen extent -2.63,-2 2,2, body extent -2.03,-2.03 2.03,2.04, height 0.8
TI-D14_N [mm] "SOIC, 14-Leads, Body 8.65x3.9mm, Pitch 1.27mm, IPC Medium Density"
  oval 2.2x0.6 smd: 1(-2.4,3.81) 2(-2.4,2.54) 3(-2.4,1.27) 4(-2.4,0) 5(-2.4,-1.27) 6(-2.4,-2.54) 7(-2.4,-3.81) 8(2.4,-3.81) 9(2.4,-2.54) 10(2.4,-1.27) 11(2.4,0) 12(2.4,1.27) 13(2.4,2.54) 14(2.4,3.81)
  silkscreen extent -2.52,-4.4 0.9,4.78, body extent -2,-4.38 2,4.38, height 1.75
TI-DW16_N [mm] "SOIC, 16-Leads, Body 10.3x7.5mm, Pitch 1.27mm, IPC Medium Density"
  oval 2.3x0.6 smd: 1(-4.65,4.445) 2(-4.65,3.175) 3(-4.65,1.905) 4(-4.65,0.635) 5(-4.65,-0.635) 6(-4.65,-1.905) 7(-4.65,-3.175) 8(-4.65,-4.445) 9(4.65,-4.445) 10(4.65,-3.175) 11(4.65,-1.905) 12(4.65,-0.635) 13(4.65,0.635) 14(4.65,1.905) 15(4.65,3.175) 16(4.65,4.445)
  silkscreen extent -4.68,-5.25 3,5.42, body extent -3.8,-5.25 3.8,5.25, height 2.65
TRIMMER [mil]
  round 60 hole 32: 1(0,0) 2(100,0) 3(200,0)
  silkscreen extent -75,-100 275,100, body extent -88,-95 288,95, height 455
WE-TPC_4818 [mm] "Power Inductor, SMD, 2-Leads, body 4.8x4.8mm"
  rect 5.3x0.9 smd paste-403.566 mask-403.566: 1(0,2.3) 2(0,-2.3)
  Top Layer region: -2.65,0.75 -1.636,0.75 -1.636,0.75 -1.138,1.394 -0.407,1.753 0.407,1.753 1.138,1.394 1.636,0.75 1.636,0.75 2.65,0.75 2.65,0.75 2.65,2.75 -2.65,2.75
  Top Layer region: 2.65,-0.75 1.636,-0.75 1.636,-0.75 1.138,-1.394 0.407,-1.753 -0.407,-1.753 -1.138,-1.394 -1.636,-0.75 -1.636,-0.75 -2.65,-0.75 -2.65,-0.75 -2.65,-2.75 2.65,-2.75
  silkscreen extent -2.5,-0.45 2.5,0.45, body extent -2.4,-2.4 2.4,2.4, height 1.8
YA8779 [mm]
  rect 1.9x1.6 smd paste+0 mask+0: 1(-4.05,3.735) 2(-4.05,1.245) 3(-4.05,-1.245) 4(-4.05,-3.735) 5(4.05,-3.735) 6(4.05,-1.245) 7(4.05,1.245) 8(4.05,3.735)
  silkscreen extent -5.97,-5.25 5.25,5.25, body extent -4.4,-5.1 4.4,5.1, height 10.63

## Part data
C1C1 C1C2 C1C3 C1C4 C5 C6 C7 C8: library part C0805C102J2GECAUTO, "MLCC Ceramic 1 nF 200 V 5% Capacitor", Manufacturer=KEMET, Package="0805 (2012 Metric)", Tolerance=5%, Voltage="200 V", Composition=NP0, Created On="30/05/2020 9:42:16", Part Number=C0805C102J2GECAUTO, Through Hole=0, Type=capacitor_ceramic, Updated On="30/05/2020 9:42:22"
C2C1 C2C2 C2C3 C2C4 C40: library part C0805C103K5GEC7210, "MLCC Ceramic 10 nF 50 V 10% Capacitor", Manufacturer=KEMET, Package="0805 (2012 Metric)", Tolerance=10%, Voltage="50 V", Composition=NP0, Created On="28/05/2020 20:55:06", Part Number=C0805C103K5GEC7210, Through Hole=0, Type=capacitor_ceramic, Updated On="28/05/2020 20:58:59"
C3C1 C3C2 C3C3 C3C4: library part 08055C104K4Z2A, "MLCC Ceramic 100 nF 50 V 10% Capacitor", Manufacturer=AVX, Package="0805 (2012 Metric)", Tolerance=10%, Voltage="50 V", Composition=X7R, Created On="30/05/2020 9:36:24", Part Number=08055C104K4Z2A, Through Hole=0, Type=capacitor_ceramic, Updated On="30/05/2020 9:36:39"
C4: library part 0805YC104KAT4A, "MLCC Ceramic 100 nF 16 v 10% Capacitor", Manufacturer=AVX, Package="0805 (2012 Metric)", Tolerance=10%, Voltage="16 V", Composition=X7R, Created On="21/05/2020 21:26:42", Part Number=0805YC104KAT4A, Through Hole=0, Type=capacitor_ceramic, Updated On="21/05/2020 21:29:08"
C9 C10: library part 08055A5R1CAT2A, "MLCC Ceramic 5.1 pF 50 V 0.25 pF Capacitor", Manufacturer=AVX, Package="0805 (2012 Metric)", Tolerance="0.25 pF", Voltage="50 V", Composition=NP0, Created On="27/05/2020 19:30:15", Part Number=08055A5R1CAT2A, Through Hole=0, Type=capacitor_ceramic, Updated On="27/05/2020 19:30:52"
C11: library part C0805C475K4RACAUTO, "MLCC Ceramic 4.7 uF 16 V 10% Capacitor", Manufacturer=KEMET, Package="0805 (2012 Metric)", Tolerance=10%, Voltage="16 V", Composition=X7R, Created On="01/06/2020 18:25:07", Part Number=C0805C475K4RACAUTO, Through Hole=0, Type=capacitor_ceramic, Updated On="01/06/2020 18:25:50"
C12 C13 C14 C16: library part 0603YC104KAT2A, "MLCC Ceramic 100 nF 16 v 10% Capacitor", Manufacturer=AVX, Package="0603 (1608 Metric)", Tolerance=10%, Voltage="16 V", Composition=X7R, Created On="22/07/2020 19:09:12", Part Number=0603YC104KAT2A, Through Hole=0, Type=capacitor_ceramic, Updated On="22/07/2020 19:10:15"
C15 C25 C27 C42 C43: library part 0805YC105KAT4A, "MLCC Ceramic 1 uF 16 V 10% Capacitor", Manufacturer=AVX, Package="0805 (2012 Metric)", Tolerance=10%, Voltage="16 V", Composition=X7R, Created On="18/07/2020 20:46:26", Part Number=0805YC105KAT4A, Through Hole=0, Type=capacitor_ceramic, Updated On="18/07/2020 20:46:47"
C17 C23: library part 08051C220JAT2A, "MLCC Ceramic 22 pF 100 V 5% Capacitor", Manufacturer=AVX, Package="0805 (2012 Metric)", Tolerance=5%, Voltage="100 V", Composition=X7R, Created On="03/07/2020 16:35:00", Part Number=08051C220JAT2A, Through Hole=0, Type=capacitor_ceramic, Updated On="03/07/2020 16:36:02"
C18: library part JMK325AC7107MM-P, "MLCC Ceramic 100 uF 6.3 V 20% Capacitor", Manufacturer="Taiyo Yuden", Package="1210 (3225 Metric)", Tolerance=20%, Voltage="6.3 V", Composition=X7S, Created On="03/07/2020 19:44:15", Part Number=JMK325AC7107MM-P, Through Hole=0, Type=capacitor_ceramic, Updated On="03/07/2020 19:44:30"
C19: library part 08051C104J4T4A, "MLCC Ceramic 0.1 uF 100 V 10% Capacitor", Manufacturer=AVX, Package="0805 (2012 Metric)", Tolerance=10%, Voltage="100 V", Composition=X7R, Created On="10/07/2020 23:21:56", Part Number=08051C104J4T4A, Through Hole=0, Type=capacitor_ceramic, Updated On="10/07/2020 23:22:31"
C20 C22: library part C3225X7S2A475M200AB, "MLCC Ceramic 4.7 uF 100 V 20% Capacitor", Manufacturer=TDK, Package="1210 (3225 Metric)", Tolerance=20%, Voltage="100 V", Composition=X7S, Created On="10/07/2020 20:19:29", Part Number=C3225X7S2A475M200AB, Through Hole=0, Type=capacitor_ceramic, Updated On="10/07/2020 20:19:45"
C21: library part EEEFK2A330P, "Aluminum Electrolytic 33 uF 100 V 20% Capacitor", Lifetime Temperature="2000 Hours @ 105 ºC", Manufacturer=Panasonic, Maximum Temperature="-55 ºC", Minimum Temperature="105 ºC", Package=SMD, Tolerance=20%, Voltage="100 V", Created On="08/07/2020 20:44:47", ESR="700 mOhms", Material=aluminium, Part Number=EEEFK2A330P, Polarised=1, Through Hole=0, Type=capacitor_electrolytic, Updated On="08/07/2020 21:47:25"
C24 C38: library part C2012X7R2A473K125AA, "MLCC Ceramic 47 nF 100 V 10% Capacitor", Manufacturer=TDK, Package="0805 (2012 Metric)", Tolerance=10%, Voltage="200 V", Composition=X7R, Created On="31/05/2020 9:04:57", Part Number=C2012X7R2A473K125AA, Through Hole=0, Type=capacitor_ceramic, Updated On="31/05/2020 9:07:12"
C26: library part C0805C222K5RACTU, "MLCC Ceramic 2.2 nF 50 V 10% Capacitor", Manufacturer=KEMET, Package="0805 (2012 Metric)", Tolerance=10%, Voltage="50 V", Composition=X7R, Created On="16/07/2020 19:02:56", Part Number=C0805C222K5RACTU, Through Hole=0, Type=capacitor_ceramic, Updated On="16/07/2020 19:04:14"
C28: library part 08055C122KAT2A, "MLCC Ceramic 1.2 nF 50 V 10% Capacitor", Manufacturer=AVX, Package="0805 (2012 Metric)", Tolerance=10%, Voltage="50 V", Composition=X7R, Created On="16/07/2020 19:09:00", Part Number=08055C122KAT2A, Through Hole=0, Type=capacitor_ceramic, Updated On="16/07/2020 19:09:07"
C29: library part C0805C225K8RAC, "MLCC Ceramic 2.2 uF 10 V 10% Capacitor", Manufacturer=KEMET, Package="0805 (2012 Metric)", Tolerance=10%, Voltage="10 V", Composition=X7R, Created On="16/07/2020 19:49:50", Part Number=C0805C225K8RAC, Through Hole=0, Type=capacitor_ceramic, Updated On="16/07/2020 19:49:57"
C30: library part 08055A560JAT2A, "MLCC Ceramic 56 pF 50 V 5% Capacitor", Manufacturer=AVX, Package="0805 (2012 Metric)", Tolerance=10%, Voltage="50 V", Composition=NP0, Created On="16/07/2020 19:36:43", Part Number=08055A560JAT2A, Through Hole=0, Type=capacitor_ceramic, Updated On="16/07/2020 19:36:54"
C31 C34: library part 0805YC106MAT2A, "MLCC Ceramic 10 uF 25 V 20% Capacitor", Manufacturer=AVX, Package="0805 (2012 Metric)", Tolerance=20%, Voltage="16 V", Composition=X7R, Created On="22/06/2020 21:37:18", Part Number=0805YC106MAT2A, Through Hole=0, Type=capacitor_ceramic, Updated On="22/06/2020 21:37:31"
C32 C35: library part 06033C105KAT4A, "MLCC Ceramic 1 uF 25 V 10% Capacitor", Manufacturer=AVX, Package="0603 (1608 Metric)", Tolerance=10%, Voltage="25 V", Composition=X7R, Created On="22/06/2020 21:33:54", Part Number=06033C105KAT4A, Through Hole=0, Type=capacitor_ceramic, Updated On="22/06/2020 21:34:12"
C33 C36: library part 06035C104K4Z2A, "MLCC Ceramic 100 nF 50 V 10% Capacitor", Manufacturer=AVX, Package="0603 (1608 Metric)", Tolerance=10%, Voltage="50 V", Composition=X7R, Created On="22/06/2020 21:28:51", Part Number=06035C104K4Z2A, Through Hole=0, Type=capacitor_ceramic, Updated On="22/06/2020 21:29:02"
C37 C39: library part 06031U680GAT2A, "MLCC Ceramic 68 pF 100 V 2% Capacitor", Manufacturer=AVX, Package="0603 (1608 Metric)", Tolerance=2%, Voltage="100 V", Composition=NP0, Created On="23/06/2020 20:31:11", Part Number=06031U680GAT2A, Through Hole=0, Type=capacitor_ceramic, Updated On="23/06/2020 20:32:22"
C41: library part C3225X7R2A225K230AB, "MLCC Ceramic 2.2 uF 100 V 10% Capacitor", Manufacturer=TDK, Package="1210 (3225 Metric)", Tolerance=10%, Voltage="100 V", Composition=X7R, Created On="20/07/2020 23:03:57", Part Number=C3225X7R2A225K230AB, Through Hole=0, Type=capacitor_ceramic, Updated On="20/07/2020 23:04:45"
D1C1 D1C2 D1C3 D1C4 D5C1 D5C2 D5C3 D5C4: "Schottky Diode", Forward Voltage="0.45 V", Manufacturer=STMicroelectronics, Maximum Forward Avg. Current="150 mA", Maximum Repetitive Reverse Voltage="100 V", Package=SOD-323, Reverse Leakage Current="5 uA", Created On="16/05/2020 11:52:41", Diode Type=schottky, Part Number=BAT46JFILM, Through Hole=0, Type=diode_rectifier, Updated On="16/05/2020 14:59:23"
D2C1 D2C2 D2C3 D2C4 D4C1 D4C2 D4C3 D4C4: "General Purpose Diode", Forward Voltage="1 V", Manufacturer="Comchip Technology", Maximum Forward Avg. Current="100 mA", Maximum Repetitive Reverse Voltage="90 V", Package=SOD-523F, Reverse Leakage Current="50 nA", Created On="16/05/2020 11:56:11", Diode Type=rectifier, Part Number=CDSU101A-HF, Through Hole=0, Type=diode_rectifier, Updated On="16/05/2020 15:37:54"
D3C1 D3C2 D3C3 D3C4: "TVS Diode", Manufacturer=STMicroelectronics, Maximum Clamping Voltage="53.9 V", Minimum Breakdown Voltage="39 V", Package=DO-214AA-2, Standoff Reverse Voltage="33.3 V", Created On="16/05/2020 11:52:32", Part Number=SM6T39CAY, Through Hole=0, Type=diode_tvs, Updated On="16/05/2020 15:46:11"
D6C1 D6C2 D6C3 D6C4: "Zener Diode 3.3 V 200 mW", Forward Voltage="0.6 V", Manufacturer=Vishay, Maximum Power="200 mW", Package=SOD-323-2, Tolerance=5%, Zener Voltage="3.3 nA", Created On="16/05/2020 22:26:20", Part Number=BZX384C3V3-E3-08, Through Hole=0, Type=diode_zener, Updated On="16/05/2020 22:36:30"
D7: "Schottky Diode", Forward Voltage="0.5 V", Manufacturer="ON Semiconductor", Maximum Forward Avg. Current="3 A", Maximum Repetitive Reverse Voltage="40 V", Package=DO-214AD, Reverse Leakage Current="100 uA", Created On="30/06/2020 19:58:51", Diode Type=schottky, Part Number=FSV340AF, Through Hole=0, Type=diode_rectifier, Updated On="30/06/2020 20:11:25"
D8: "Power Zener 1 W 24 V", Forward Voltage="24 V", Manufacturer="Diodes Incorporated", Maximum Power="1 W", Package="PowerDI 123-2", Created On="30/06/2020 21:18:03", Part Number=DFLZ24-7, Through Hole=0, Type=diode_zener, Updated On="30/06/2020 21:18:48"
D9: "Zener 300 mW 4.7 V", Part Number=BZT52C4V7T
D10: "High Speed Silicon Switching Diode", Forward Voltage="1 V", Manufacturer="Central Semiconductor Corp.", Maximum Forward Avg. Current="250 mA", Maximum Repetitive Reverse Voltage="100 V", Package=SOD-323, Reverse Leakage Current="25 nA", Created On="02/07/2020 19:02:22", Diode Type=rectifier, Part Number=CMDD4448, Through Hole=0, Type=diode_rectifier, Updated On="02/07/2020 19:05:20"
D11: "CAN bus TVS diode", Manufacturer=Bourns, Maximum Clamping Voltage="26 V", Minimum Breakdown Voltage="12 V", Package=SOT-23, Standoff Reverse Voltage="13.3 V", Created On="22/06/2020 21:57:13", Part Number=CDSOT23-SM712, Through Hole=0, Type=diode_tvs, Updated On="22/06/2020 21:57:43"
D12 D13 D14 D15: "Standard Green SMD LED", Input Offset Voltage="0.5 mm x 1 mm", Manufacturer="Stanley Electric", Package="0805 (2012 Metric)", Voltage Supplies="5 mA", Amplifier Type=diffused, Created On="30/05/2020 15:25:43", Gain Bandwith Product="1.9 V", Input Type=clear, Output Type="yellow green", Part Number=VFHD1112H-3B72B-TR, Slew Rate="572 nm", Through Hole=0, Type=led_indicator, Updated On="30/05/2020 13:30:29"
D16: "Zener 200 mW 10 V", Forward Voltage="0.9 V", Manufacturer="Diodes Incorporated", Maximum Power="200 mW", Package=SOD-323-2, Zener Voltage="10 V", Created On="19/07/2020 12:49:44", Part Number=MMSZ5240BS-7-F, Through Hole=0, Type=diode_zener, Updated On="19/07/2020 13:00:21"
FB1C1 FB1C2 FB1C3 FB1C4 FB2C1 FB2C2 FB2C3 FB2C4: library part BLM21SP601SH1D, "Ferrite bead", Current Rating="1.5 A", DC Resistance="60 mOhms", Manufacturer="Murata Electronics", Package="0805 (2012 Metric)", Created On="16/05/2020 11:32:40", Impedance Frequency="600 Ohms @ 100 MHz", Number of Lines=1, Part Number=BLM21SP601SH1D, Through Hole=0, Type=ferrite_bead, Updated On="16/05/2020 17:15:58"
FB3: library part BLM21SP601SH1D, "Ferrite bead", Current Rating="1.5 A", DC Resistance="60 mOhms", Impedance Frequency="600 Ohms @ 100 MHz", Manufacturer="Murata Electronics", Package="0805 (2012 Metric)", Created On="16/05/2020 11:32:40", Number of Lines=1, Part Number=BLM21SP601SH1D, Through Hole=0, Type=ferrite_bead, Updated On="16/05/2020 17:15:58"
FB4: library part 742792021, "Ferrite bead 22 Ohms @ 100 MHz", Current Rating="6 A", DC Resistance="8 mOhms", Manufacturer="Würth Electronik", Package="0805 (2012 Metric)", Created On="10/07/2020 22:54:16", Impedance Frequency="22 Ohms @ 100 MHz", Number of Lines=1, Part Number=742792021, Through Hole=0, Type=ferrite_bead, Updated On="10/07/2020 23:17:54"
IC1: "MOSFET 100V P-Chnl UMOS", Drain Source Max Current="3.7 A", Drain Source Max Voltage="100 V", Drain Source Resistance="150 mOhms", Gate Source Max Voltage="20 V", Gate Source Threshold Voltage="2 V", Manufacturer="Diodes Incorporated", Maximum Power="3.9 W", Package=SOT-223-4, Channel Type=P-Channel, Created On="19/07/2020 8:37:51", Part Number=ZXMP10A18GTA, Through Hole=0, Type=transistor_mosfet, Updated On="19/07/2020 11:20:23"
J1C1 J1C2 J1C3 J1C4: "Pluggable Terminal Blocks 2 Pos 5mm pitch Through Hole Header", Current Rating="12 A", Manufacturer="Phoenix Contact", Package="Through Hole", Voltage Rating="250 V", Created On="18/07/2020 15:45:14", LatestRevisionDate=17-Jul-2002, LatestRevisionNote="Re-released for DXP Platform.", Number of Contacts=2, Number of Rows=1, Orientation=right, Part Number=1757475, Pitch="5 mm", Publisher="Altium Limited", Through Hole=1, Type=connector_pcb, Updated On="18/07/2020 15:45:51"
J2: "Shrouded Terminal Strip, 0.050 pitch", Current Rating="1 A", Manufacturer=Samtec, Package="Through Hole", Voltage Rating="300 V", Created On="31/05/2020 10:51:13", Number of Contacts=10, Number of Rows=2, Orientation=straight, Part Number=SHF-105-01-L-D-TH, Pitch="50 mil", Through Hole=1, Type=connector_pcb, Updated On="31/05/2020 10:51:32"
J3: "DSUB SV FE SSDP ANG-US 09P AU3", Current Rating="6 A", Manufacturer=Harting, Package="Through Hole", Created On="18/07/2020 11:53:48", Number of Contacts=9, Number of Rows=2, Orientation=right, Part Number=09681537613, Pitch="2.77 mm", Through Hole=1, Type=connector_pcb, Updated On="18/07/2020 11:54:47"
JP1 JP2: "Connector Header Through Hole 2 position 0.100 (2.54mm)", Current Rating="3 A", Manufacturer="Würth Elektronik", Package="Through Hole", Voltage Rating="250 V", Created On="19/07/2020 13:40:52", Number of Contacts=2, Number of Rows=1, Orientation=straight, Part Number=61300211121, Pitch="100 mil", Through Hole=1, Type=connector_pcb, Updated On="19/07/2020 13:41:17"
L1: library part 744042100, "Tinny Power Inductor 10 uH 1.3 A", Current Rating="1.3 A", Current Saturation="1 A", Manufacturer="Würth Electronik", Package=ACT45B, Resistance DCR="120 mOhms", Test Frequency="100 kHz", Tolerance=30%, Created On="10/07/2020 20:04:38", Part Number=744042100, Through Hole=0, Type=power_inductor, Updated On="10/07/2020 20:09:18"
L2: library part SRR1208-331KL, "Shielded Power Inductor 330 uH 0.85 A", Current Rating="0.85 A", Current Saturation="1.12 A", Manufacturer=Bourns, Package=SRR1280, Resistance DCR="650 mOhms", Test Frequency="0.796 MHz", Tolerance=10%, Created On="13/07/2020 19:41:55", Part Number=SRR1208-331KL, Through Hole=0, Type=power_inductor, Updated On="13/07/2020 19:43:17"
L3: library part ACT45B-510-2P-TL003, "CAN Bus Common Choke", Current Rating="200 mA", DC Resistance="1 Ohms", Impedance Frequency="2800 Ohms @ 10 MHz", Manufacturer=TDK, Package=ACT45B, Created On="23/06/2020 19:40:24", Number of Lines=2, Part Number=ACT45B-510-2P-TL003, Through Hole=0, Type=inductor_choke, Updated On="23/06/2020 20:05:36"
Q1C1 Q1C2 Q1C3 Q1C4: "PNP BJT Switching transistor", Collector Emiter Saturation Voltage="250 mW", Collector Max. Current="200 mA", Manufacturer=Nexperia, Package=SOT-23, BJT Type=PNP, Collector Emiter Max. Votage="40 V", Created On="17/05/2020 17:12:55", hfe Gain=300, Maximum Power="250 mW", Part Number=MMBT3906,215, Through Hole=0, Type=transistor_bjt, Updated On="17/05/2020 18:19:58"
Q2 Q3 Q4 Q5: "NPN BJT Switching transistor", Collector Emiter Saturation Voltage="250 mW", Collector Max. Current="200 mA", Manufacturer=Nexperia, Package=SOT-23, BJT Type=NPN, Collector Emiter Max. Votage="40 V", Created On="30/05/2020 12:12:43", hfe Gain=300, Maximum Power="250 mW", Part Number=MMBT3904,215, Through Hole=0, Type=transistor_bjt, Updated On="30/05/2020 12:14:29"
R1C1 R1C2 R1C3 R1C4: library part PAT0805E25R0BST1, "Thin Film Resistor 25 Ohms 0.1%", Manufacturer=Vishay, Package="0805 (2012 Metric)", Power Max="200 mW", Tolerance=0.1%, Created On="16/05/2020 11:40:45", Part Number=PAT0805E25R0BST1, Through Hole=0, Type=resistor, Updated On="16/05/2020 13:13:11"
R2C1 R2C2 R2C3 R2C4 R3C1 R3C2 R3C3 R3C4: library part CRCW080510K0FKEAC, "Thin Film Resistor 10 kOhms 1%", Manufacturer="Vishay / Dale", Package="0805 (2012 Metric)", Power Max="125 mW", Tolerance=1%, Created On="16/05/2020 11:50:43", Part Number=CRCW080510K0FKEAC, Through Hole=0, Type=resistor, Updated On="16/05/2020 13:13:15"
R4C1 R4C2 R4C3 R4C4 R15 R16: library part CRCW0805100RFKEAC, "Thin Film Resistor 100 Ohms 1%", Manufacturer="Vishay / Dale", Package="0805 (2012 Metric)", Power Max="125 mW", Tolerance=1%, Created On="16/05/2020 11:51:25", Part Number=CRCW0805100RFKEAC, Through Hole=0, Type=resistor, Updated On="16/05/2020 13:13:19"
R5 R7 R9 R11: library part CRCW080547K5FKEA, "Thin Film Resistor 47.5 kOhms 1%", Manufacturer="Vishay / Dale", Package="0805 (2012 Metric)", Power Max="125 mW", Tolerance=1%, Created On="19/05/2020 19:54:22", Part Number=CRCW080547K5FKEA, Through Hole=0, Type=resistor, Updated On="19/05/2020 19:54:45"
R6 R8 R10 R12: library part 3296W-1-503ALF, "Inline Multitourn 50 kOhms 10% potentiometer", Part Number=3296W-1-503ALF
R13 R14 R35 R36 R37 R38: library part CRCW060310K0FKEAC, "Thin Film Resistor 10 kOhms 1%", Manufacturer="Vishay / Dale", Package="0603 (1608 Metric)", Power Max="100 mW", Tolerance=1%, Created On="22/07/2020 22:08:22", Part Number=CRCW060310K0FKEAC, Through Hole=0, Type=resistor, Updated On="22/07/2020 22:09:01"
R17 R18: library part CRCW0805130KFKEAC, "Thin Film Resistor 130 kOhms 1%", Manufacturer="Vishay / Dale", Package="0805 (2012 Metric)", Power Max="125 mW", Tolerance=1%, Created On="09/07/2020 18:08:17", Part Number=CRCW0805130KFKEAC, Through Hole=0, Type=resistor, Updated On="09/07/2020 18:08:28"
R19: library part CRCW0805536KFKEA, "Thin Film Resistor 536 kOhms 1%", Manufacturer="Vishay / Dale", Package="0805 (2012 Metric)", Power Max="125 mW", Tolerance=1%, Created On="09/07/2020 18:04:35", Part Number=CRCW0805536KFKEA, Through Hole=0, Type=resistor, Updated On="09/07/2020 18:04:45"
R20 R24: library part CRCW0805100KFKEAC, "Thin Film Resistor 100 kOhms 1%", Manufacturer="Vishay / Dale", Package="0805 (2012 Metric)", Power Max="125 mW", Tolerance=1%, Created On="09/07/2020 18:07:58", Part Number=CRCW0805100KFKEAC, Through Hole=0, Type=resistor, Updated On="09/07/2020 18:08:25"
R21: library part CRCW080512K1FKEA, "Thin Film Resistor 12.1 kOhms 1%", Manufacturer="Vishay / Dale", Package="0805 (2012 Metric)", Power Max="125 mW", Tolerance=1%, Created On="09/07/2020 18:06:27", Part Number=CRCW080512K1FKEA, Through Hole=0, Type=resistor, Updated On="09/07/2020 18:06:42"
R22: library part CRCW0805340KFKEAC, "Thin Film Resistor 340 kOhms 1%", Manufacturer="Vishay / Dale", Package="0805 (2012 Metric)", Power Max="125 mW", Tolerance=1%, Created On="16/07/2020 18:43:47", Part Number=CRCW0805340KFKEAC, Through Hole=0, Type=resistor, Updated On="16/07/2020 18:45:23"
R23: library part CRCW0805316KFKEAC, "Thin Film Resistor 316 kOhms 1%", Manufacturer="Vishay / Dale", Package="0805 (2012 Metric)", Power Max="125 mW", Tolerance=1%, Created On="16/07/2020 18:47:45", Part Number=CRCW0805316KFKEAC, Through Hole=0, Type=resistor, Updated On="16/07/2020 18:48:00"
R25: library part CRCW080541K2FKEAC, "Thin Film Resistor 41.2 kOhms 1%", Manufacturer="Vishay / Dale", Package="0805 (2012 Metric)", Power Max="125 mW", Tolerance=1%, Created On="16/07/2020 18:51:09", Part Number=CRCW080541K2FKEAC, Through Hole=0, Type=resistor, Updated On="16/07/2020 18:51:15"
R26 R27: library part CRCW080560R4FKEA, "Thin Film Resistor 60.4 Ohms 1%", Manufacturer="Vishay / Dale", Package="0805 (2012 Metric)", Power Max="125 mW", Tolerance=1%, Created On="19/05/2020 17:44:54", Part Number=CRCW080560R4FKEA, Through Hole=0, Type=resistor, Updated On="19/05/2020 17:46:42"
R28 R29 R30: library part CRCW08055K00FKTA, "Thin Film Resistor 5 kOhms 1%", Manufacturer="Vishay / Dale", Package="0805 (2012 Metric)", Power Max="125 mW", Tolerance=1%, Created On="18/07/2020 20:15:54", Part Number=CRCW08055K00FKTA, Through Hole=0, Type=resistor, Updated On="18/07/2020 20:16:33"
R31 R32 R33 R34: library part CRCW0805240RFKEA, "Thin Film Resistor 240 Ohms 1%", Manufacturer="Vishay / Dale", Package="0805 (2012 Metric)", Power Max="125 mW", Tolerance=1%, Created On="30/05/2020 13:33:46", Part Number=CRCW0805240RFKEA, Through Hole=0, Type=resistor, Updated On="30/05/2020 13:34:19"
R39: library part CRCW080528K0FKEA, "Thin Film Resistor 28 kOhms 1%", Manufacturer="Vishay / Dale", Package="0805 (2012 Metric)", Power Max="125 mW", Tolerance=1%, Created On="19/07/2020 13:06:42", Part Number=CRCW080528K0FKEA, Through Hole=0, Type=resistor, Updated On="19/07/2020 13:07:02"
T1: "YA8779 Flyback Transformer", Current Rating="0.380 uH", Manufacturer=Coilcraft, Package=YA8779, Primary Inductance="30 uH", Primary Voltage Rating="70 V", Secondary Current Rating="1.2 A", Secondary Voltage Rating="5 V", Created On="24/06/2020 22:00:46", NPS Turns Ratio=1:0.330, Number of Windings=2, Part Number=YA8779-BLD, Primary DCR="0.140 Ohms", Secondary DCR="0.013 Ohms", Through Hole=0, Type=transformer, Updated On="29/06/2020 22:52:20"
U1C1 U1C2 U1C3 U1C4: "HCNR200 High-Linearity Analog Optocoupler", Input FOrward Voltage="1.6 V", Isolation Voltage="1414 V", Manufacturer="Broadcom / Avago", Package="DIP-8 Gull Wing", Created On="17/05/2020 9:43:12", Forward Gain=0.5, Non Linearity=0.01%, Part Number=HCNR200-550E, Servo Gain=0.5, Through Hole=0, Transfer Gain=1.00, Type=optocoupler_linear, Updated On="17/05/2020 9:47:26"
U2C1 U2C2 U2C3 U2C4: "TLV2371 Rail-to-Rail I/O Opamp", Input Offset Voltage="2 mV", Manufacturer="Texas Instruments", Output Current="100 mA", Package=SOT-23-5, Voltage Supplies="2.7-16 V", Amplifier Type="125 mW", Created On="17/05/2020 15:21:19", Gain Bandwith Product="3 MHz", Input Type=Rail-to-Rail, Output Type=Rail-to-Rail, Part Number=TLV2371IDBV, Slew Rate="2.4 V/us", Through Hole=0, Type=opamp, Updated On="17/05/2020 15:21:42"
U3: "TLV2374 Rail-to-Rail I/O Opamp", Input Offset Voltage="2 mV", Manufacturer="Texas Instruments", Output Current="100 mA", Package=SOIC-14, Voltage Supplies="2.7-16 V", Amplifier Type="125 mW", Created On="17/05/2020 16:02:41", Gain Bandwith Product="3 MHz", Input Type=Rail-to-Rail, Output Type=Rail-to-Rail, Part Number=TLV2374ID, Slew Rate="2.4 V/us", Through Hole=0, Type=opamp, Updated On="17/05/2020 16:03:47"